# Altium PCB PCB1.PcbDoc
Units mm, origin at the board's own origin, x right, y up, seen from the top; angles counter-clockwise.
Board outline 160.15 x 34.04 mm, 2 copper layers (Top Layer, Bottom Layer); 26 components, 23 nets, 108 pads, 26 vias.
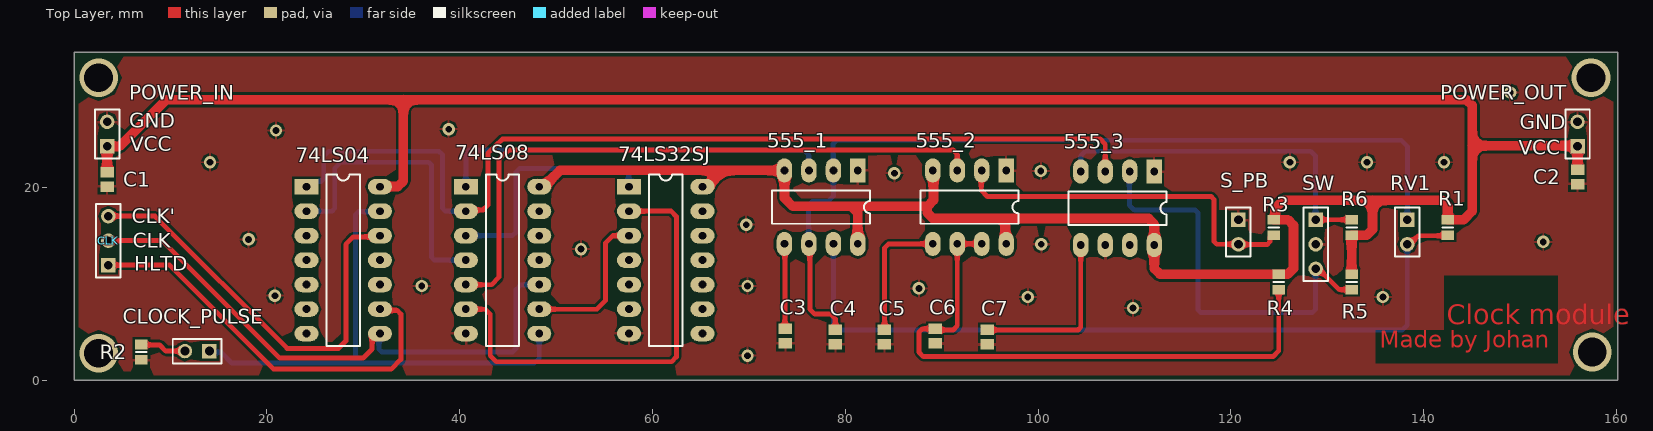
[diagram p0: Top Layer view]
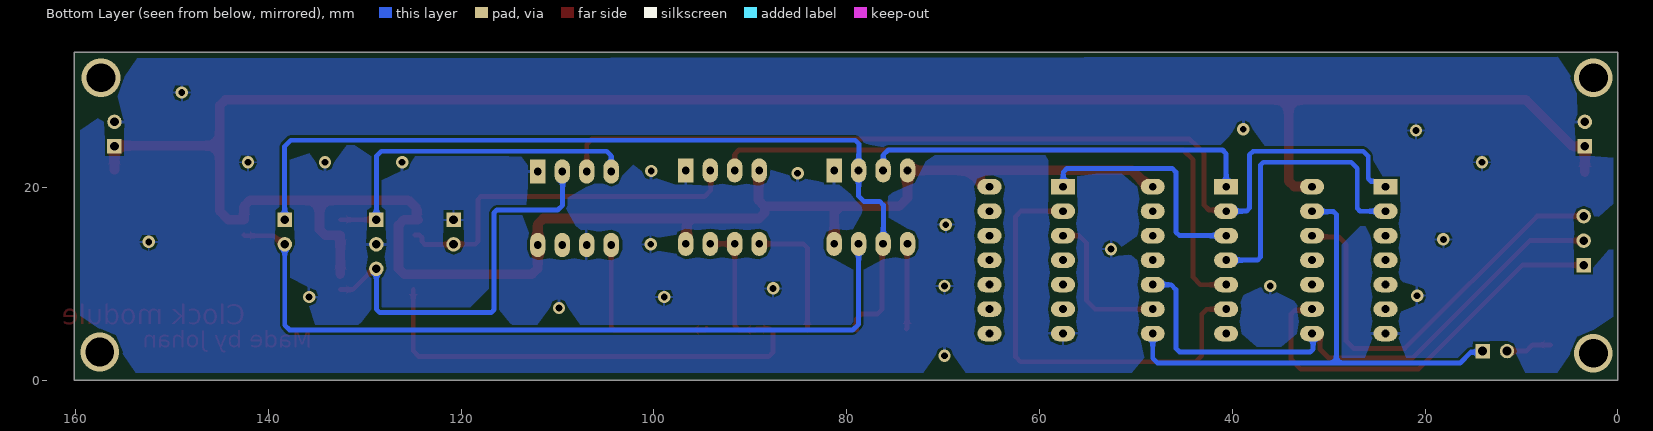
[diagram p1: Bottom Layer view, seen from below]

## Layer stack, top to bottom
Top Solder: solder mask 0.0102, Solder Resist, Dk 3.5
Top Layer: signal copper 0.0356
Dielectric 1: dielectric 0.32, FR-4, Dk 4.8
Bottom Layer: signal copper 0.0356
Bottom Solder: solder mask 0.0102, Solder Resist, Dk 3.5

## Board outline
0,0 160.147,0 160.147,34.036 0,34.036

## Design rules (kind name [scope] priority, off if disabled: settings)
BoardOutlineClearance [All] p1: gap=0.5 ignorepadtopadclearanceinfootprint=FALSE
Clearance [All] p1: gap=0.254 ignorepadtopadclearanceinfootprint=FALSE except(0: Arc-Hole Track-Hole SMDPad-Hole THPad-Hole Via-Hole Fill-Hole Poly-Hole Region-Hole Text-Hole)
PolygonConnect [All] p1: connectstyle=Relief reliefconductorwidth=0.254 reliefentries=4 polygonreliefangle="90 Angle" airgapwidth=0.254
RoutingVias [All] p1: holewidth=0.711 width=1.27 viastyle="Through Hole" minholewidth=0.711 minwidth=1.27 maxholewidth=0.711 maxwidth=1.27
SolderMaskExpansion [All] p1: expansion=0.102 istentingtop=FALSE
Width VCC [InNet('VCC')] p1: maxlimit=2 minlimit=1 preferedwidth=1
Width wire [All] p2: maxlimit=2 minlimit=0.5 preferedwidth=0.5
Width GND [InNet('GND')] p3: maxlimit=2 minlimit=1 preferedwidth=1
30 further rules are at their usual default settings.

## Components (designator, comment, footprint, x,y, rotation, side; value= is the part's Value field where it differs from the comment)
74LS04 "SN74LS04N" SN74LS04N 24.108,20.075 r0 top
74LS08 "DM74LS08N" SN74LS08N 40.636,20.075 r0 top
74LS32SJ "DM74LS32SJ" SN74LS32N 57.566,20.075 r0 top
555_1 "NE555P" LM555 81.307,21.758 r270 top
555_2 "NE555P" LM555 96.698,21.758 r270 top
555_3 "NE555P" LM555 112.049,21.645 r270 top
C1 "Cap Pol3" C0805 3.429,20.828 r270 top value=100pF
C2 "Cap Pol3" C0805 155.956,21.082 r270 top value=100pF
C3 "Cap Pol3" C0805 73.787,4.572 r270 top value=100pF
C4 "Cap Pol3" C0805 78.971,4.47 r270 top value=100pF
C5 "Cap Pol3" C0805 84.064,4.47 r270 top value=100pF
C6 "Cap Pol3" C0805 89.317,4.572 r270 top value=100pF
C7 "Cap Pol3" C0805 94.714,4.47 r270 top value=100pF
CLK "Header 3" HDR1X3 3.556,11.938 r90 top
CLOCK_PULSE "LED0" HDR1X2 14.046,3.021 r180 top
POWER_IN "Header 2" HDR1X2 3.429,24.257 r90 top
POWER_OUT "Header 2" HDR1X2 155.956,24.257 r90 top
R1 "" 6-0805_L 142.516,15.849 r90 top value=1K
R2 "" 6-0805_L 6.985,2.901 r90 top value=1K
R3 "" 6-0805_L 124.446,15.849 r270 top value=1K
R4 "" 6-0805_L 124.956,10.196 r270 top value=1K
R5 "" 6-0805_L 132.522,10.196 r270 top value=1K
R6 "" 6-0805_L 132.522,15.849 r90 top value=1K
RV1 "Res Adj1" HDR1X2 138.286,16.637 r270 top value=1K
S_PB "SW-PB" HDR1X2 120.78,16.637 r270 top
SW "SW-SPDT" HDR1X3 128.8,16.637 r270 top

## Footprints (in the part's own frame and the unit in brackets; to place one, negate y for a bottom-side part, rotate by r counter-clockwise, add the part's x,y. Pads: shape width x height; smd on the part's side, far side on the other; paste and mask are expansions set on the pad)
6-0805_L [mm] "Chip Resistor, Body 2.0x1.2mm, IPC High Density"
  rect 1x1.3 smd: 1(-0.8,0) 2(0.8,0)
  silkscreen extent 0,-0.55 0,0.55, body extent -1.07,-0.7 1.07,0.7, height 0.7
C0805 [mm] "Chip Capacitor, Body 2.0x1.3mm, IPC High Density"
  rect 1.1x1.4 smd: 1(-0.75,0) 2(0.75,0)
  body extent -1.1,-0.72 1.1,0.72, height 1.4
HDR1X2 [mm] "Connector; Header; 2 Position"
  rect 1.5x1.5 hole 0.9: 1(0,0)
  round 1.5 hole 0.9: 2(2.54,0)
  silkscreen extent -1.27,-1.27 3.81,1.27
HDR1X3 [mm] "Connector; Header; 3 Position"
  rect 1.5x1.5 hole 0.9: 1(0,0)
  round 1.5 hole 0.9: 2(2.54,0) 3(5.08,0)
  silkscreen extent -1.27,-1.27 6.35,1.27
LM555 [mm]
  rect 2.5x1.6 hole 0.8: 1(0,0)
  oval 2.5x1.6 hole 0.8: 2(0,-2.54) 3(0,-5.08) 4(0,-7.62) 5(7.62,-7.62) 6(7.62,-5.08) 7(7.62,-2.54) 8(7.62,0)
  silkscreen extent 2.08,-8.89 5.54,1.27, body extent -0.25,-9.65 14.6,1.78, height 4.69
SN74LS04N [mm]
  rect 2.5x1.6 hole 0.8: 1(0,0)
  oval 2.5x1.6 hole 0.8: 2(0,-2.54) 3(0,-5.08) 4(0,-7.62) 5(0,-10.16) 6(0,-12.7) 7(0,-15.24) 8(7.62,-15.24) 9(7.62,-12.7) 10(7.62,-10.16) 11(7.62,-7.62) 12(7.62,-5.08) 13(7.62,-2.54) 14(7.62,0)
  silkscreen extent 2.08,-16.51 5.54,1.27, body extent -0.19,-17.27 14.73,1.78, height 4.51
SN74LS08N [mm]
  rect 2.5x1.6 hole 0.8: 1(0,0)
  oval 2.5x1.6 hole 0.8: 2(0,-2.54) 3(0,-5.08) 4(0,-7.62) 5(0,-10.16) 6(0,-12.7) 7(0,-15.24) 8(7.62,-15.24) 9(7.62,-12.7) 10(7.62,-10.16) 11(7.62,-7.62) 12(7.62,-5.08) 13(7.62,-2.54) 14(7.62,0)
  silkscreen extent 2.08,-16.51 5.54,1.27, body extent -0.19,-17.02 11.18,2.03, height 4.51
SN74LS32N [mm]
  rect 2.5x1.6 hole 0.8: 1(0,0)
  oval 2.5x1.6 hole 0.8: 2(0,-2.54) 3(0,-5.08) 4(0,-7.62) 5(0,-10.16) 6(0,-12.7) 7(0,-15.24) 8(7.62,-15.24) 9(7.62,-12.7) 10(7.62,-10.16) 11(7.62,-7.62) 12(7.62,-5.08) 13(7.62,-2.54) 14(7.62,0)
  silkscreen extent 2.08,-16.51 5.54,1.27, body extent -0.19,-17.14 7.81,1.9, height 4.01

## Part data
74LS04: "IC HEX INVERTER 14-DIP", Case/Package=PDIP, High Level Output Current=-400uA, Low Level Output Current=8mA, Manufacturer="Texas Instruments", Max Operating Temperature=70°C, Max Supply Voltage=5.25V, Min Operating Temperature=0°C, Min Supply Voltage=4.75V, Nominal Supply Current=100uA, Operating Supply Voltage=5V, Package Quantity=25, Supplier Part Number 1=9232326, ComponentLink1Description=http://www.ti.com/lit/ds/symlink/sn74ls04.pdf?src-supplier=Digi-Key, ComponentLink1URL=http://www.ti.com/lit/ds/symlink/sn74ls04.pdf?src-supplier=Digi-Key, ComponentLink2Description=http://www.ti.com/general/docs/lit/getliterature.tsp?genericPartNumber=SN54LS04-SP&&fileType=pdf&src-supplier=Avnet, ComponentLink2URL=http://www.ti.com/general/docs/lit/getliterature.tsp?genericPartNumber=SN54LS04-SP&&fileType=pdf&src-supplier=Avnet, ComponentLink3Description=https://www.verical.com/server-webapp/html/getDatasheet?partID=257461&src-supplier=Verical, ComponentLink3URL=https://www.verical.com/server-webapp/html/getDatasheet?partID=257461&src-supplier=Verical, ComponentLink4Description=https://www.distrelec.biz/Web/Downloads/55/06/ix645506.pdf?mime=application%2Fpdf&src-supplier=Distrelec, ComponentLink4URL=https://www.distrelec.biz/Web/Downloads/55/06/ix645506.pdf?mime=application%2Fpdf&src-supplier=Distrelec, ComponentLink5Description=http://www.ti.com/lit/ds/symlink/sn54ls04-sp.pdf?src-supplier=Avnet+Europe, ComponentLink5URL=http://www.ti.com/lit/ds/symlink/sn54ls04-sp.pdf?src-supplier=Avnet+Europe, ComponentLink6Description=http://www.produktinfo.conrad.com/datenblaetter/1000000-1099999/001016869-da-01-en-IC_HEX_INV_SN74LS0_SN74LS04N_PDIP_14_TID.pdf?src-supplier=Conrad, ComponentLink6URL=http://www.produktinfo.conrad.com/datenblaetter/1000000-1099999/001016869-da-01-en-IC_HEX_INV_SN74LS0_SN74LS04N_PDIP_14_TID.pdf?src-supplier=Conrad, ComponentLink7Description=http://www.produktinfo.conrad.com/datenblaetter/150000-174999/172049-da-01-en-IC_SN74_LS_04_N_DIP14_TID.pdf?src-supplier=Conrad, ComponentLink7URL=http://www.produktinfo.conrad.com/datenblaetter/150000-174999/172049-da-01-en-IC_SN74_LS_04_N_DIP14_TID.pdf?src-supplier=Conrad, Contact Plating=Gold, Height=4.57mm, Lead Free="Lead Free", Length=19.3mm, Logic Function=Buffer,Inverter, Manufacturer Part Number=SN74LS04N, Max Output Current=8mA, Mount="Through Hole", Number of Bits=6, Number of Circuits=6, Number of Elements=6, Number of Gates=6, Number of Inputs=1, Number of Output Lines=6, Number of Pins=14, Output Current=8mA, Packaging=Rail/Tube, Propagation Delay=15ns, Radiation Hardening=No, REACH SVHC="No SVHC", Schmitt Trigger Input=No, Stock 1=0, Supplier 1=RSComponents, Termination="Through Hole", Turn-On Delay Time=22ns, Weight=0.032734oz, Width=6.35mm
74LS08: "IC GATE AND 4CH 2-INP 14-DIP", Case/Package=DIP, High Level Output Current=-400uA, Low Level Output Current=8mA, Manufacturer="ON Semiconductor / Fairchild", Max Operating Temperature=70°C, Max Supply Voltage=5.25V, Min Operating Temperature=0°C, Min Supply Voltage=4.75V, Package Quantity=25, Supplier Part Number 1=512-DM74LS08N, Category="Logic Gates", ComponentLink1Description=https://datasheet.ciiva.com/4825/74ls08-196234-4825713.pdf?src-supplier=Mouser, ComponentLink1URL=https://datasheet.ciiva.com/4825/74ls08-196234-4825713.pdf?src-supplier=Mouser, ComponentLink2Description=https://datasheet.ciiva.com/1877/dm74ls08-1877307.pdf?src-supplier=Digi-Key, ComponentLink2URL=https://datasheet.ciiva.com/1877/dm74ls08-1877307.pdf?src-supplier=Digi-Key, Lead Free="Contains Lead", Logic Function=AND, Manufacturer Part Number=DM74LS08N, Mount="Through Hole", Number of Circuits=4, Number of Gates=4, Number of Inputs=2, Number of Pins=14, Packaging=Rail/Tube, Propagation Delay=18ns, RoHS=Yes, Supplier 1=Mouser
74LS32SJ: "Logic Gates Quad 2-Input OR Gate", Case/Package=SOP, High Level Output Current=-400uA, Low Level Output Current=8mA, Manufacturer="ON Semiconductor / Fairchild", Max Operating Temperature=70°C, Max Supply Voltage=5.25V, Min Operating Temperature=0°C, Min Supply Voltage=4.75V, Supplier Part Number 1=512-DM74LS32SJ, Category="Logic Gates", ComponentLink1Description=http://www.mouser.com/ds/2/149/FairchildSemiconductor_16141919504962-795956.pdf?src-supplier=Mouser, ComponentLink1URL=http://www.mouser.com/ds/2/149/FairchildSemiconductor_16141919504962-795956.pdf?src-supplier=Mouser, Manufacturer Part Number=DM74LS32SJ, Number of Gates=4, Number of Input Lines=2, Number of Output Lines=1, Packaging=Rail/Tube, Propagation Delay=15ns, RoHS=Yes, Supplier 1=Mouser
555_1 555_2 555_3: "TEXAS INSTRUMENTS         NE555P            TIMER SINGLE PRECISION,DIP8 ,0.5MHZ", Case/Package=PDIP, Current Rating=10mA, Frequency=500kHz, High Level Output Current=-200mA, Low Level Output Current=200mA, Manufacturer="Texas Instruments", Max Operating Temperature=70°C, Max Supply Voltage=16V, Min Operating Temperature=0°C, Min Supply Voltage=4.5V, Nominal Supply Current=2mA, Operating Supply Voltage=5V, Package Quantity=50, Quiescent Current=15mA, Supplier Part Number 1=296-NE555P-ND, Category="Clock and Timing", ComponentLink1Description=https://datasheet.ciiva.com/19457/904085-19457361.pdf?src-supplier=Jameco, ComponentLink1URL=https://datasheet.ciiva.com/19457/904085-19457361.pdf?src-supplier=Jameco, ComponentLink2Description=https://datasheet.ciiva.com/1139/sa555-1139904.pdf?src-supplier=Element14, ComponentLink2URL=https://datasheet.ciiva.com/1139/sa555-1139904.pdf?src-supplier=Element14, ComponentLink3Description=https://datasheet.ciiva.com/26325/152184-da-01-en-ne555p-timer-tid-26325915.pdf?src-supplier=Conrad, ComponentLink3URL=https://datasheet.ciiva.com/26325/152184-da-01-en-ne555p-timer-tid-26325915.pdf?src-supplier=Conrad, ComponentLink4Description=https://datasheet.ciiva.com/1147/1764032-1147750.pdf?src-supplier=Newark, ComponentLink4URL=https://datasheet.ciiva.com/1147/1764032-1147750.pdf?src-supplier=Newark, ComponentLink5Description=https://datasheet.ciiva.com/14094/ne555-series-eng-tds-14094950.pdf?src-supplier=Distrelec, ComponentLink5URL=https://datasheet.ciiva.com/14094/ne555-series-eng-tds-14094950.pdf?src-supplier=Distrelec, ComponentLink6Description=https://datasheet.ciiva.com/14274/ne555-14274456.pdf?src-supplier=Avnet, ComponentLink6URL=https://datasheet.ciiva.com/14274/ne555-14274456.pdf?src-supplier=Avnet, ComponentLink7Description=https://datasheet.ciiva.com/15152/getdatasheetpartid-248510-15152620.pdf?src-supplier=Verical, ComponentLink7URL=https://datasheet.ciiva.com/15152/getdatasheetpartid-248510-15152620.pdf?src-supplier=Verical, ComponentLink8Description=https://datasheet.ciiva.com/1233/ne555-1233454.pdf?src-supplier=Digi-Key, ComponentLink8URL=https://datasheet.ciiva.com/1233/ne555-1233454.pdf?src-supplier=Digi-Key, ComponentLink9Description=https://datasheet.ciiva.com/26228/ne555-26228892.pdf?src-supplier=Avnet+Europe, ComponentLink9URL=https://datasheet.ciiva.com/26228/ne555-26228892.pdf?src-supplier=Avnet+Europe, Contact Plating=Gold, Height=4.57mm, Lead Free="Lead Free", Length=9.81mm, Manufacturer Part Number=NE555P, Mount="Through Hole", Number of Pins=8, Number of Timers/Counters=1, Operating Supply Current=10mA, Packaging=Rail/Tube, Pricing 1="1=0,45000, 10=0,34200, 25=0,30800, 100=0,21280, 250=0,17920, 500=0,14560, 1000=0,11200, 2500=0,10080, 5000=0,09520 (USD)", Radiation Hardening=No, REACH SVHC="No SVHC", RoHS=Yes, Stock 1=8033, Supplier 1=Digi-Key, Weight=0.015535oz, Width=6.35mm
C1 C2 C3 C4 C5 C6 C7: "Polarized Capacitor (Surface Mount)", LatestRevisionDate=29-May-2009, LatestRevisionNote="IPC-7351 Footprint Added.", PackageDescription="Chip Capacitor", PackageReference=C0805, Published=8-Jun-2000, Publisher="Altium Limited"
CLK: "Header, 3-Pin", LatestRevisionDate=17-Jul-2002, LatestRevisionNote="Re-released for DXP Platform.", Publisher="Altium Limited"
CLOCK_PULSE: "Typical INFRARED GaAs LED", LatestRevisionDate=08-Jul-2005, LatestRevisionNote="Mech Layer 1 removed.", PackageDescription="LED; 2 Leads", PackageReference=LED-0, Published=8-Jun-2000, Publisher="Altium Limited"
POWER_IN POWER_OUT: "Header, 2-Pin", LatestRevisionDate=17-Jul-2002, LatestRevisionNote="Re-released for DXP Platform.", Publisher="Altium Limited"
R1 R2 R3 R4 R5 R6: library part Res3, "Resistor", LatestRevisionDate=29-May-2009, LatestRevisionNote="IPC-7351 Footprint Added.", PackageDescription="Chip Resistor", PackageReference=J1-0603, Published=8-Jun-2000, Publisher="Altium Limited"
RV1: "Variable Resistor", LatestRevisionDate=17-Jul-2002, LatestRevisionNote="Re-released for DXP Platform.", PackageDescription="Axial Device, Thru-Hole; 2 Leads; 0.7 in Pin Spacing", PackageReference=AXIAL-0.7, Published=8-Jun-2000, Publisher="Altium Limited", Set Position=0.5
S_PB: "Switch", LatestRevisionDate=17-Jul-2002, LatestRevisionNote="Re-released for DXP Platform.", PackageDescription="Switch; 2 Leads", PackageReference=SPST-2, Published=24-Mar-1999, Publisher="Altium Limited"
SW: "SPDT Subminiature Toggle Switch, Right Angle Mounting, Vertical Actuation", ComponentLink1Description="Manufacturer Link", ComponentLink1URL=http://www.apem.com, DatasheetVersion=05-Dec-2000, LatestRevisionDate=17-Dec-2003, LatestRevisionNote="Schematic revised, PCB Footprint replaced.", PackageDescription="Switch; 4 Leads", PackageReference=TL36WW15050, Published=24-Mar-1999, Publisher="Altium Limited"

## Via types
v1: diameter 1.27, hole 0.711, Top Layer to Bottom Layer, tented both sides, 22 vias
v2: diameter 4, hole 3, Top Layer to Bottom Layer, 4 vias

## Nets (pads, with @x,y where several pads share a name; then routed paths per layer and width w, separated by ;. In a path a pad name is that pad's centre, name@x,y a point inside that pad or via, vN(x,y) a via of type N, cw(c..) or ccw(c..) an arc to the next point about the centre after c; other vN are vias at no path point)
GND: 74LS04.7 74LS08.7 74LS32SJ.7 555_1.1 555_2.1 555_3.1 555_3.6 C1.2 C2.2 C3.2 C4.2 C5.2 C6.2 C7.2 POWER_IN.2 POWER_OUT.2 R2.1 S_PB.1 SW.2
  other v1: 69.85,2.54 109.855,7.493 98.933,8.636 135.763,8.636 20.828,8.763 87.63,9.525 36.068,9.779 69.85,9.779 52.578,13.589 100.33,14.097 152.4,14.351 18.113,14.606 69.723,16.129 85.09,21.463 100.279,21.687 14.113,22.606 126.113,22.606 134.113,22.606 142.113,22.606 20.955,25.908 38.862,26.035 148.971,29.845
Net74LS04_1: 74LS04.1 74LS08.2 555_3.3 | length 100.9
  Top Layer w0.5: 74LS08.2 40.753,17.653 42.418,17.653 42.926,18.161 42.926,23.545 44.011,24.63 44.061,24.63 44.45,25.019 106.426,25.019 106.969,24.476 555_3.3
  Bottom Layer w0.5: 74LS04.1 24.658,20.625 25.615,20.625 25.908,20.918 25.908,23.241 26.416,23.749 37.846,23.749 38.227,23.368 38.227,17.828 38.52,17.535 74LS08.2
Net74LS04_2: 74LS04.2 74LS08.4 | length 30.9
  Bottom Layer w0.5: 74LS04.2 24.117,17.526 26.758,17.526 27.051,17.819 27.051,21.971 27.686,22.606 36.791,22.606 37.084,22.313 37.084,12.748 37.377,12.455 74LS08.4
Net74LS04_8: 74LS04.8 74LS08.10 CLK.2 | length 59.7
  Top Layer w0.5: CLK.2 9.144,14.478 21.336,2.286 29.972,2.286 30.907,3.221 30.907,4.167 31.575,4.835 74LS04.8
  Bottom Layer w0.5: 74LS04.8 31.623,4.731 31.623,3.214 31.916,2.921 45.466,2.921 45.847,3.302 45.847,9.398 46.355,9.906 48.246,9.906 74LS08.10
Net74LS04_9: 74LS04.9 CLK.1 | length 42.3
  Top Layer w0.5: CLK.1 9.906,11.938 20.701,1.143 32.893,1.143 33.909,2.159 33.909,6.858 33.528,7.239 31.864,7.239 74LS04.9
Net74LS04_12: 74LS04.12 CLK.3 | length 44.6
  Top Layer w0.5: CLK.3 8.382,17.018 22.098,3.302 27.432,3.302 28.194,4.064 28.194,14.097 28.956,14.859 31.591,14.859 74LS04.12
Net74LS04_13: 74LS04.13 74LS08.8 CLOCK_PULSE.1 | length 55.6
  Bottom Layer w0.5: CLOCK_PULSE.1 14.16,2.907 15.254,2.907 16.383,1.778 29.21,1.778 ; 74LS04.13 31.675,17.483 29.503,17.483 29.21,17.19 29.21,1.778 ; 74LS08.8 48.256,2.282 47.752,1.778 29.21,1.778
Net74LS08_1: 74LS08.1 555_1.3 | length 41
  Bottom Layer w0.5: 74LS08.1 40.64,20.08 40.64,23.495 41.021,23.876 75.692,23.876 76.197,23.371 76.197,21.788 555_1.3
Net74LS08_3: 74LS08.3 74LS32SJ.1 | length 25.1
  Bottom Layer w0.5: 74LS08.3 45.475,14.995 45.847,15.367 45.847,21.59 46.228,21.971 57.15,21.971 57.531,21.59 57.531,20.11 74LS32SJ.1
Net74LS08_5: 74LS08.5 555_2.3 | length 65.8
  Top Layer w0.5: 74LS08.5 40.645,9.906 43.307,9.906 44.069,10.668 44.069,22.86 45.085,23.876 91.186,23.876 91.618,23.444 555_2.3
Net74LS08_6: 74LS08.6 74LS32SJ.2 | length 46.6
  Top Layer w0.5: 74LS08.6 40.645,7.366 42.672,7.366 43.18,6.858 43.18,2.54 43.815,1.905 61.976,1.905 62.484,2.413 62.484,16.979 61.928,17.535 74LS32SJ.2
Net74LS08_9: 74LS08.9 74LS32SJ.3 | length 16
  Top Layer w0.5: 74LS08.9 48.265,7.366 54.229,7.366 55.118,8.255 55.118,14.224 55.889,14.995 74LS32SJ.3
Net555_1_2: 555_1.2 555_1.6 C4.1 RV1.1 | length 91.1
  Top Layer w0.5: 555_1.6 76.327,14.038 76.327,7.366 76.835,6.858 78.486,6.858 78.971,6.373 C4.1
  Bottom Layer w0.5: 555_1.6 76.2,14.165 76.2,18.161 76.581,18.542 78.232,18.542 78.767,19.077 555_1.2 78.74,21.785 78.74,24.511 79.121,24.892 137.668,24.892 138.303,24.257 138.303,16.654 RV1.1
Net555_1_5: 555_1.5 C3.1 | length 8.9
  Top Layer w0.5: 555_1.5 73.737,14.088 73.737,5.372 C3.1
Net555_1_7: 555_1.7 R1.1 RV1.2 | length 81.3
  Top Layer w0.5: RV1.2 138.557,14.097 139.446,14.986 142.453,14.986 R1.1
  Bottom Layer w0.5: 555_1.7 78.767,5.815 79.375,5.207 137.795,5.207 138.286,5.698 RV1.2
Net555_2_2: 555_2.2 R3.2 S_PB.2 | length 38.3
  Top Layer w0.5: 555_2.2 94.107,21.707 94.107,19.685 94.742,19.05 117.944,19.05 118.237,18.757 118.237,14.39 118.53,14.097 S_PB.2 120.806,14.071 123.753,14.071 124.046,14.364 124.046,14.799 124.296,15.049 R3.2@124.771,15.049
Net555_2_5: 555_2.5 C5.1 | length 13.7
  Top Layer w0.5: C5.1 84.074,5.23 84.074,13.716 84.496,14.138 555_2.5
Net555_2_6: 555_2.6 555_2.7 C6.1 R4.2 | length 61.6
  Top Layer w0.5: 555_2.7 555_2.6 91.618,5.639 91.186,5.207 89.432,5.207 C6.1 89.305,5.334 88.011,5.334 87.63,4.953 87.63,2.921 88.105,2.446 124.366,2.446 124.958,3.038 124.958,9.396 R4.2@124.968,9.405
Net555_3_2: 555_3.2 R5.2 SW.3 | length 42.3
  Top Layer w0.5: SW.3 129.07,11.557 131.232,9.396 R5.2
  Bottom Layer w0.5: 555_3.2 109.474,21.61 109.474,18.161 109.982,17.653 116.293,17.653 116.586,17.36 116.586,7.304 116.879,7.011 128.423,7.011 128.778,7.366 128.778,11.535 SW.3
Net555_3_4: 555_3.4 R6.2 SW.1 | length 36.8
  Top Layer w0.5: SW.1 SW.1@128.838,16.599 ; SW.1@128.811,16.649 R6.2
  Bottom Layer w0.5: 555_3.4 104.435,21.651 104.435,23.282 104.902,23.749 128.27,23.749 128.778,23.241 128.778,16.659 SW.1 SW.1@128.811,16.649
Net555_3_5: 555_3.5 C7.1 | length 18.6
  Top Layer w0.5: C7.1@94.538,5.396 C7.1 94.727,5.207 104.136,5.207 104.429,5.5 555_3.5
NetCLOCK_PULSE_2: CLOCK_PULSE.2 R2.2 | length 4.8
  Top Layer w0.5: R2.2@6.985,3.651 8.895,3.651 9.525,3.021 CLOCK_PULSE.2
VCC: 74LS04.14 74LS08.14 74LS32SJ.14 555_1.4 555_1.8 555_2.4 555_2.8 555_3.8 C1.1 C2.1 POWER_IN.1 POWER_OUT.1 R1.2 R3.1 R4.1 R5.1 R6.1 | length 324.6
  Top Layer w1: C1.1 POWER_IN.1 4.699,24.257 9.525,29.083 34.163,29.083 ; 74LS04.14 33.577,20.075 34.163,20.661 34.163,29.083 ; 74LS08.14 48.452,20.271 48.902,20.271 50.388,21.758 67.319,21.758 ; 74LS32SJ.14 65.636,20.075 67.319,21.758 ; 555_1.8 81.28,14.165 81.28,17.399 80.645,18.034 ; 555_2.4 89.154,21.682 89.154,18.669 88.519,18.034 ; 555_2.8 96.584,14.253 96.584,16.178 95.998,16.764 ; R3.1 R3.1@124.596,16.649 ; R5.1 R6.1 134.095,15.049 134.681,15.634 134.681,18.669 ; C2.1 POWER_OUT.1 155.899,24.314 145.034,24.314 ; 34.163,29.083 144.448,29.083 145.034,28.497 145.034,24.314 ; 67.319,21.758 555_1.4 73.687,18.896 74.549,18.034 80.645,18.034 ; 80.645,18.034 88.519,18.034 ; 88.519,18.034 88.519,17.35 89.105,16.764 95.998,16.764 ; 95.998,16.764 111.463,16.764 112.049,16.178 555_3.8 112.049,11.581 112.635,10.996 R4.1 125.906,10.996 126.492,11.581 126.492,16.063 125.906,16.649 R3.1@124.596,16.649 ; R3.1@124.596,16.649 124.596,17.793 125.472,18.669 134.681,18.669 ; 134.681,18.669 141.908,18.669 142.494,18.083 142.494,16.649 R1.2 144.157,16.649 145.034,17.526 145.034,24.314
pads on no net: 74LS04.3 74LS04.4 74LS04.5 74LS04.6 74LS04.10 74LS04.11 74LS08.11 74LS08.12 74LS08.13 74LS32SJ.4 74LS32SJ.5 74LS32SJ.6 74LS32SJ.8 74LS32SJ.9 74LS32SJ.10 74LS32SJ.11 74LS32SJ.12 74LS32SJ.13 555_3.7
copper on no net:
  other v2: 2.54,2.794 157.48,2.921 2.54,31.369 157.353,31.369

## Polygon pours and split planes (outlines as drawn)
GND on Top Layer "GND_L01_P009" (solid, remove dead copper, pour order 9): 0,34.036 0,0 160.147,0 160.147,34.036
GND on Top Layer "GND_L01_P007" (solid, pour order 7): 159.258,33.274
GND on Top Layer "GND_L01_P006" (solid, pour order 6): 159.549,33.782
GND on Bottom Layer "GND_L02_P008" (solid, remove dead copper, pour order 8): 0.508,33.528 0.508,0.762 159.512,0.762 159.512,33.401

## Other copper
Top Layer:
  text "Clock module" at 142.367,5.153 h3.5
  text "Made by Johan" at 135.455,2.796 h3

## Silkscreen, mask and mechanical layers (free items; w line width, h text height)
Top Overlay:
  text "GND" at 5.715,26.162 h1.52
  text "GND" at 149.987,26.035 h1.52
  text "VCC" at 5.842,23.749 h1.52
  text "VCC" at 149.86,23.368 h1.52
  text "CLK'" at 5.969,16.289 h1.52
  text "CLK" at 6.096,13.749 h1.52
  text "HLTD" at 6.223,11.336 h1.52